# Altium PCB USBCOMPORT-TTL.PcbDoc
Units mil, origin at the board's own origin, x right, y up, seen from the top; angles counter-clockwise.
Board outline 6000 x 4000 mil, 2 copper layers (Top Layer, Bottom Layer); 10 components, 9 nets, 52 pads, 0 vias.
Unrouted connection lines stored in the file: 28.
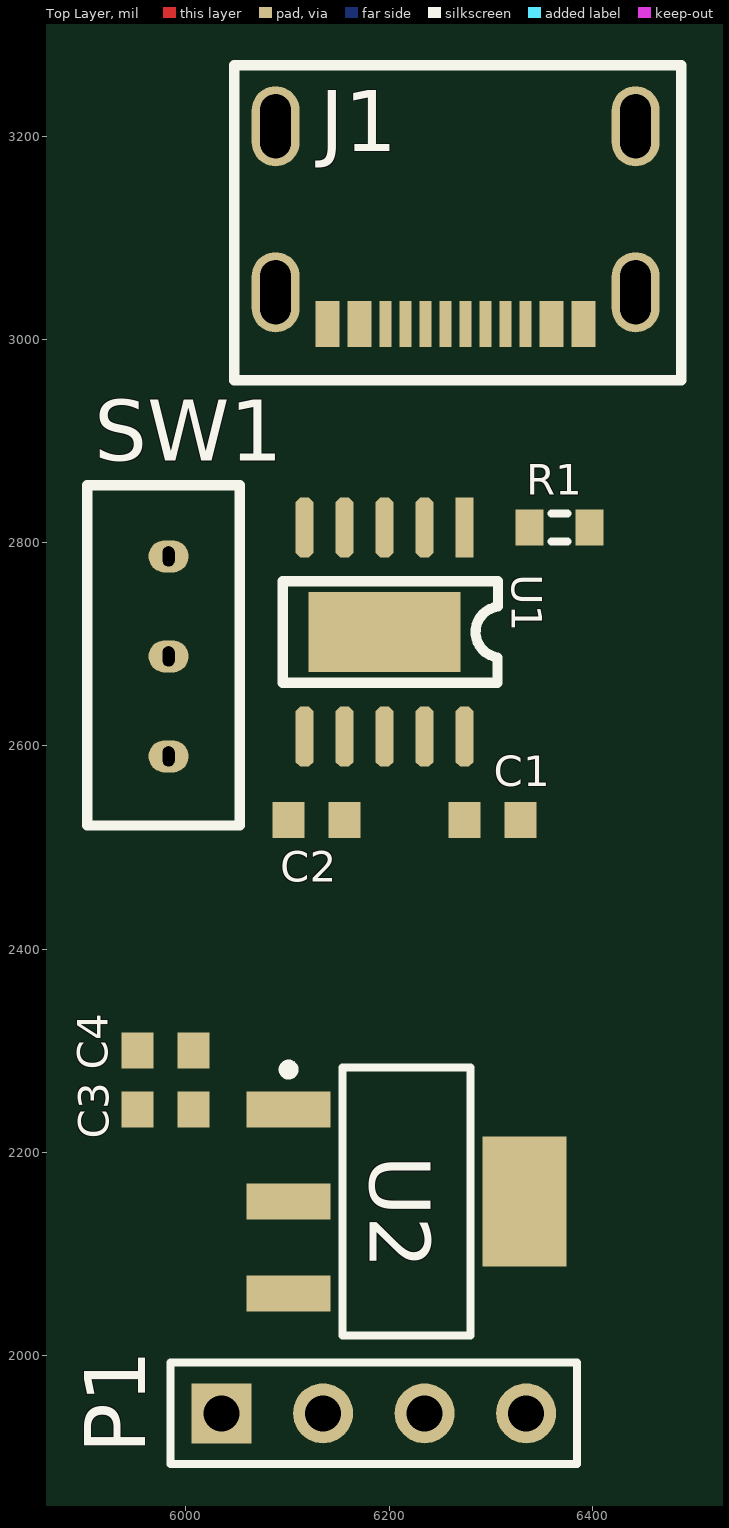
[diagram p0: Top Layer view]
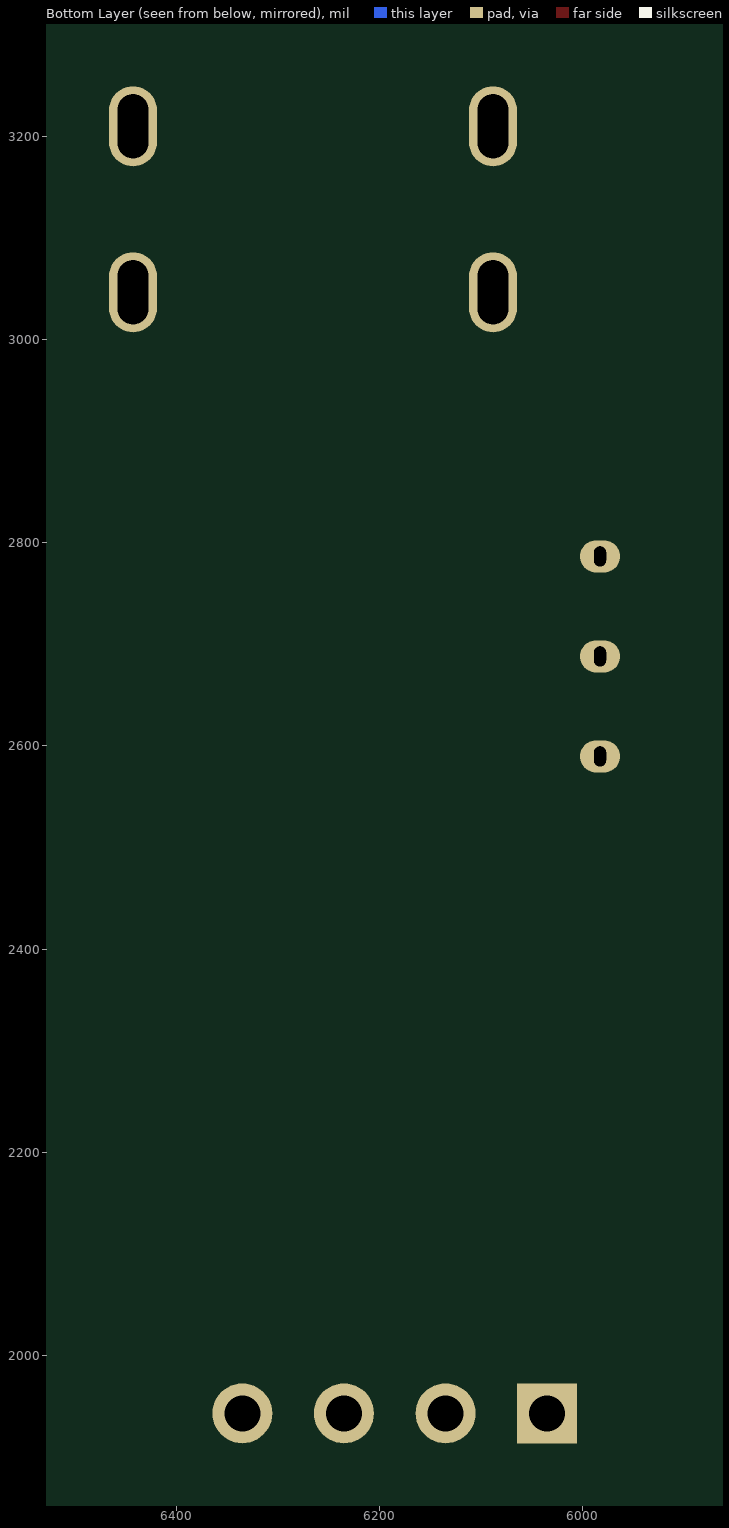
[diagram p1: Bottom Layer view, seen from below]

## Layer stack, top to bottom
Top Solder: solder mask 0.4, Solder Resist, Dk 3.5
Top Layer: signal copper 1.4
Dielectric 1: dielectric 12.6, FR-4, Dk 4.8
Bottom Layer: signal copper 1.4
Bottom Solder: solder mask 0.4, Solder Resist, Dk 3.5

## Board outline
1000,1000 7000,1000 7000,5000 1000,5000

## Design rules (kind name [scope] priority, off if disabled: settings)
Clearance [All] p1: gap=1 ignorepadtopadclearanceinfootprint=FALSE except(0: Arc-Hole Track-Hole SMDPad-Hole THPad-Hole Via-Hole Fill-Hole Poly-Hole Region-Hole Text-Hole)
PolygonConnect [All] p1: connectstyle=Relief reliefconductorwidth=10 reliefentries=4 polygonreliefangle="90 Angle" airgapwidth=10
RoutingVias [All] p1: holewidth=28 width=50 viastyle="Through Hole" minholewidth=28 minwidth=50 maxholewidth=28 maxwidth=50
SolderMaskExpansion [All] p1: expansion=4 istentingtop=FALSE
Width [All] p1: maxlimit=30 minlimit=7 preferedwidth=10 minimp=50.000000 maximp=50.000000 favimp=50.000000
30 further rules are at their usual default settings.

## Classes and differential pairs
component class USBCOMPORT-TTL: P1 SW1
component class U2: C3 C4 U2
component class U1: C1 C2 U1
component class J1: R1

## Components (designator, comment, footprint, x,y, rotation, side; value= is the part's Value field where it differs from the comment)
C1 "Cap Semi" 1608[0603] 6301.93,2527 r0 top value=0.1uF
C2 "Cap Semi" 1608[0603] 6128.7,2527 r180 top value=0.1uF
C3 "Cap Semi" 1608[0603] 5980.01,2242 r180 top value=0.1uF
C4 "Cap Semi" 1608[0603] 5979.89,2300.28 r180 top value=2.2uF
J1 "USB-TYPE-C-12PIN" USB-TYPE-C-12PIN 6442.64,3209.8 r180 top
P1 "Output" HDR1X4 6035,1943 r0 top
R1 "Res3" J1-0603 6367.83,2815 r0 top value=5.1K
SW1 "Switch-3P" SS-12D00(1P2T) 5983,2688 r270 top
U1 "CH340K" ESSOP-10 6195.35,2712.01 r270 top
U2 "LM1117-3.3v" SOT23 6217.28,2151.45 r0 top

## Footprints (in the part's own frame and the unit in brackets; to place one, negate y for a bottom-side part, rotate by r counter-clockwise, add the part's x,y. Pads: shape width x height; smd on the part's side, far side on the other; paste and mask are expansions set on the pad)
1608[0603] [mm] "Chip Capacitor, Body 1.6x0.8mm, IPC High Density"
  rect 0.8x0.9 smd: 1(-0.7,0) 2(0.7,0)
  body extent -0.87,-0.48 0.87,0.48, height 1.3
ESSOP-10 [mm]
  rect 2x3.8 smd: 0(0,0)
  rect 1.5x0.45 smd: 1(-2.616,2.007)
  oct 1.5x0.45 smd: 2(-2.616,1.007) 3(-2.616,0.007) 4(-2.616,-0.993) 5(-2.616,-1.993) 6(2.616,-1.993) 7(2.616,-0.993) 8(2.616,0.007) 9(2.616,1.007) 10(2.616,2.007)
  silkscreen extent -1.27,-2.54 1.27,2.84
HDR1X4 [mm] "Connector; Header; 4 Position"
  rect 1.5x1.5 hole 0.9: 1(0,0)
  round 1.5 hole 0.9: 2(2.54,0) 3(5.08,0) 4(7.62,0)
  silkscreen extent -1.27,-1.27 8.89,1.27
J1-0603 [mm] "Chip Resistor, Body 1.6x0.8mm, IPC High Density"
  rect 0.7x0.9 smd: 1(-0.75,0) 2(0.75,0)
  silkscreen extent -0.2,-0.35 0.2,0.35, body extent -0.85,-0.48 0.85,0.48, height 0.9
SOT23 [mm]
  rect 2.1x0.9 smd: 1(-2.95,2.3) 2(-2.95,0) 3(-2.95,-2.3)
  rect 2.1x3.25 smd: 4(2.95,0)
  silkscreen extent -3.07,-3.35 1.6,3.42, body extent -1.85,-3.35 1.85,3.35, height 1.8
SS-12D00(1P2T) [mm]
  oval 0.8x1 hole 0.3 slot 0.5 at 0 deg: 1(-2.5,0) 2(0,0) 3(2.5,0)
  silkscreen extent -4.28,-2.03 4.23,1.78
USB-TYPE-C-12PIN [mm]
  oval 1.2x2 hole 0.762 slot 1.6 at 90 deg: 0(0,4.15) 0(0,0) 0(9,0) 0(9,4.15)
  rect 0.3x1.15 smd: A1(1.15,4.948) A4(1.95,4.948) A5(3.25,4.948) A6(4.25,4.948) A7(4.75,4.948) A8(2.75,4.948) A9(7.05,4.948) A12(7.85,4.948) B1(7.55,4.948) B4(6.75,4.948) B5(6.25,4.948) B6(5.25,4.948) B7(3.75,4.948) B8(5.75,4.948) B9(2.25,4.948) B12(1.45,4.948)
  silkscreen extent -1.14,-1.52 10.03,6.35

## Part data
C1 C2 C3 C4: "Capacitor (Semiconductor SIM Model)", LatestRevisionDate=29-May-2009, LatestRevisionNote="IPC-7351 Footprint Added.", PackageDescription="Chip Capacitor", PackageReference=C1206, Published=8-Jun-2000, Publisher="Altium Limited"
P1: library part "Header 4", "Header, 4-Pin", LatestRevisionDate=17-Jul-2002, LatestRevisionNote="Re-released for DXP Platform.", Publisher="Altium Limited"
R1: "Resistor", LatestRevisionDate=29-May-2009, LatestRevisionNote="IPC-7351 Footprint Added.", PackageDescription="Chip Resistor", PackageReference=J1-0603, Published=8-Jun-2000, Publisher="Altium Limited"

## Nets (pads, with @x,y where several pads share a name; then routed paths per layer and width w, separated by ;. In a path a pad name is that pad's centre, name@x,y a point inside that pad or via, vN(x,y) a via of type N, cw(c..) or ccw(c..) an arc to the next point about the centre after c; other vN are vias at no path point)
3.3V: SW1.3 U2.2 U2.4
5V: C1.1 C2.1 C3.2 C4.2 J1.A4 J1.A9 J1.B4 J1.B9 SW1.1 U1.7 U1.10 U2.3
CC1: J1.A5 R1.1
GND: C1.2 C2.2 C3.1 C4.1 J1.A1 J1.A12 J1.B1 J1.B12 P1.2 R1.2 U1.0 U1.3 U2.1
Rx: P1.3 U1.9
Tx: P1.4 U1.8
UD+: J1.A6 U1.1
UD-: J1.A7 U1.2
Vout: P1.1 SW1.2
pads on no net: J1.0 J1.A8 J1.B5 J1.B6 J1.B7 J1.B8 U1.4 U1.5 U1.6